# Altium PCB pogo_socket_2port.PcbDoc
Units mil, origin at the board's own origin, x right, y up, seen from the top; angles counter-clockwise.
Board outline 1442 x 625 mil, 4 copper layers (Top Layer, Mid-Layer 1, Mid-Layer 2, Bottom Layer), stack 43.512 mil thick; 2 components, 3 nets, 25 pads, 234 vias.
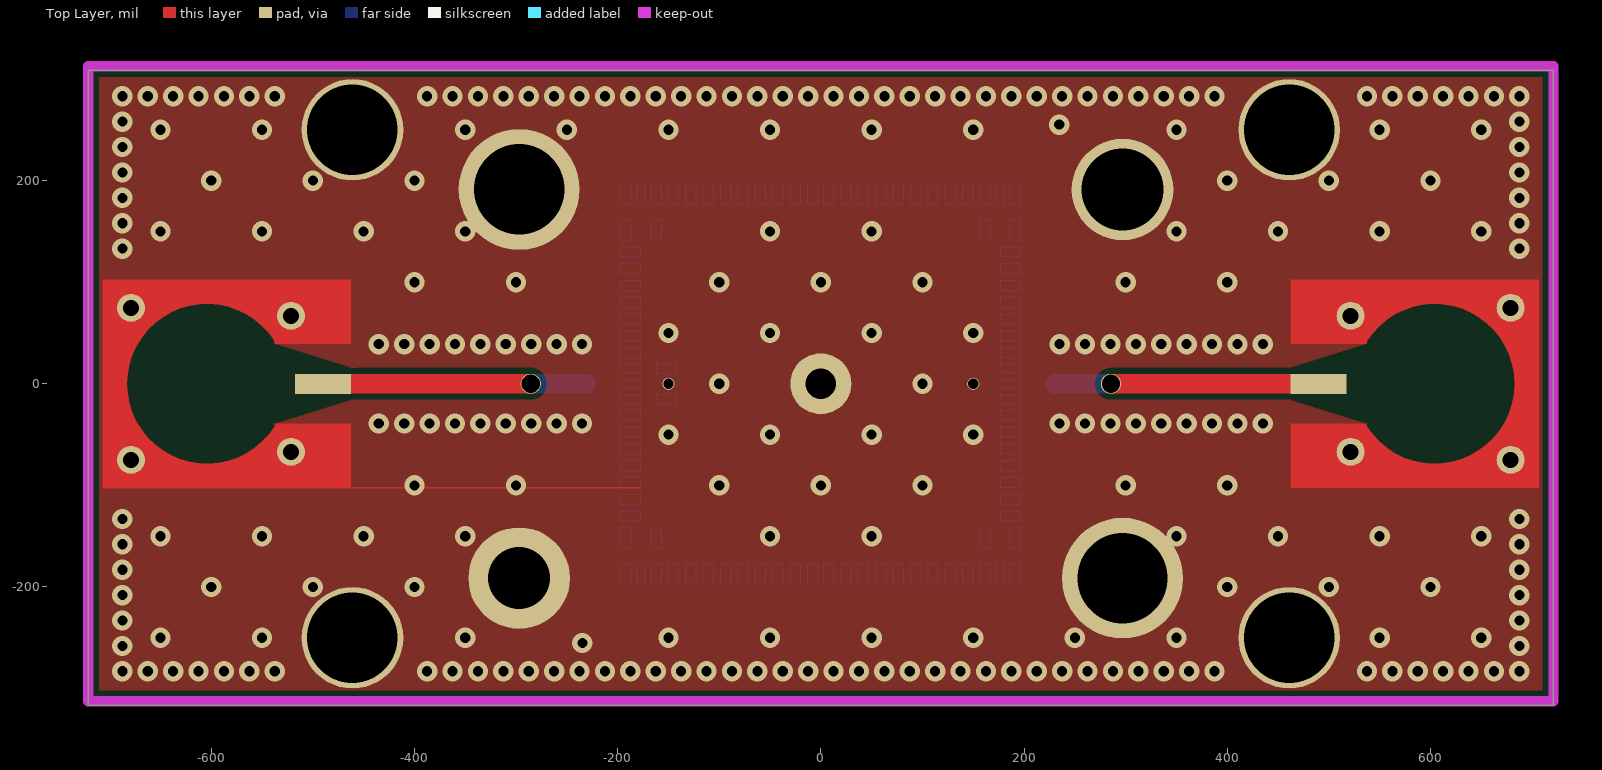
[diagram p0: Top Layer view]
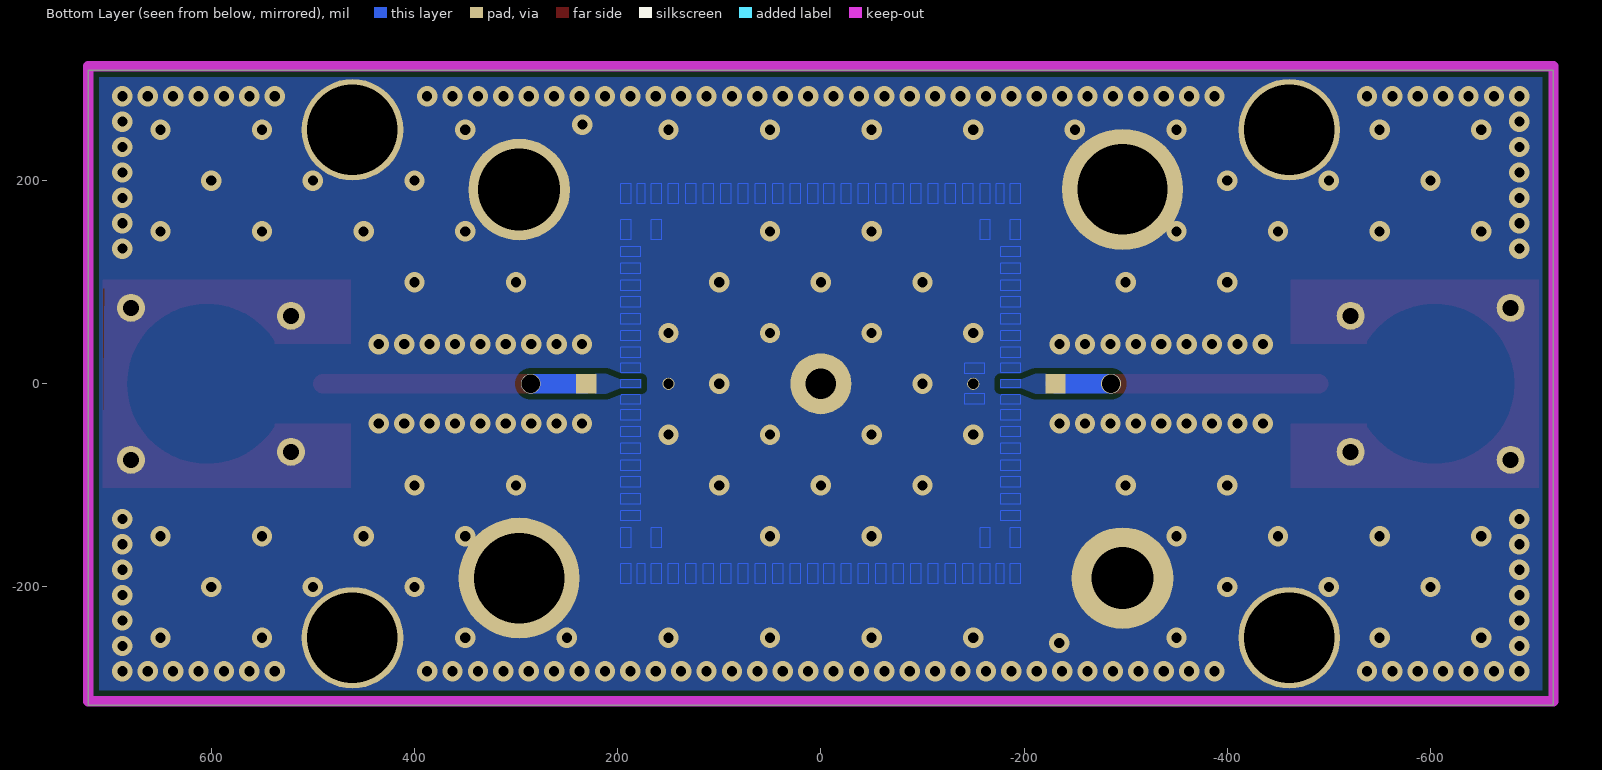
[diagram p1: Bottom Layer view, seen from below]
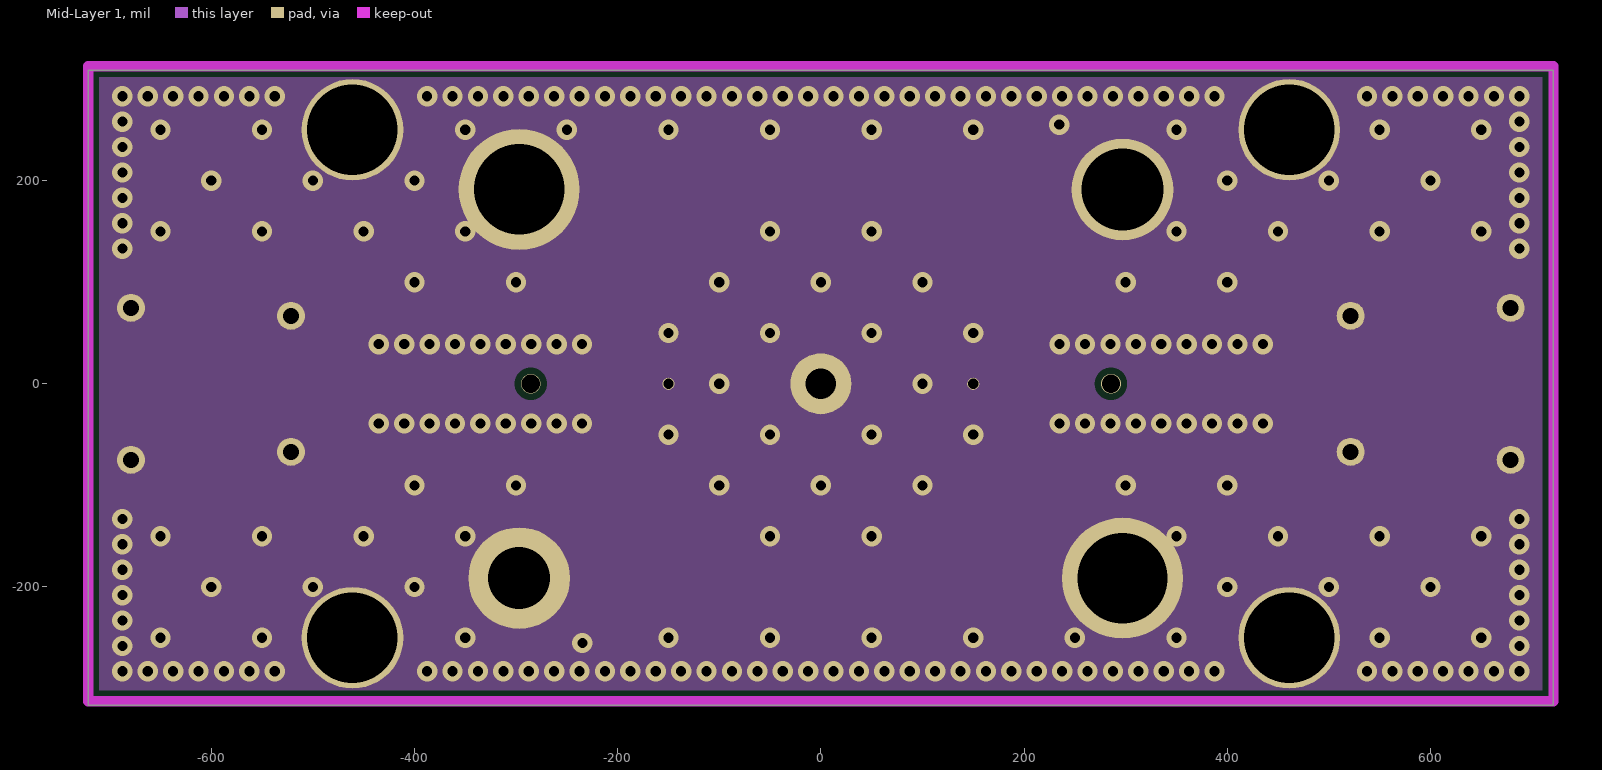
[diagram p2: Mid-Layer 1]
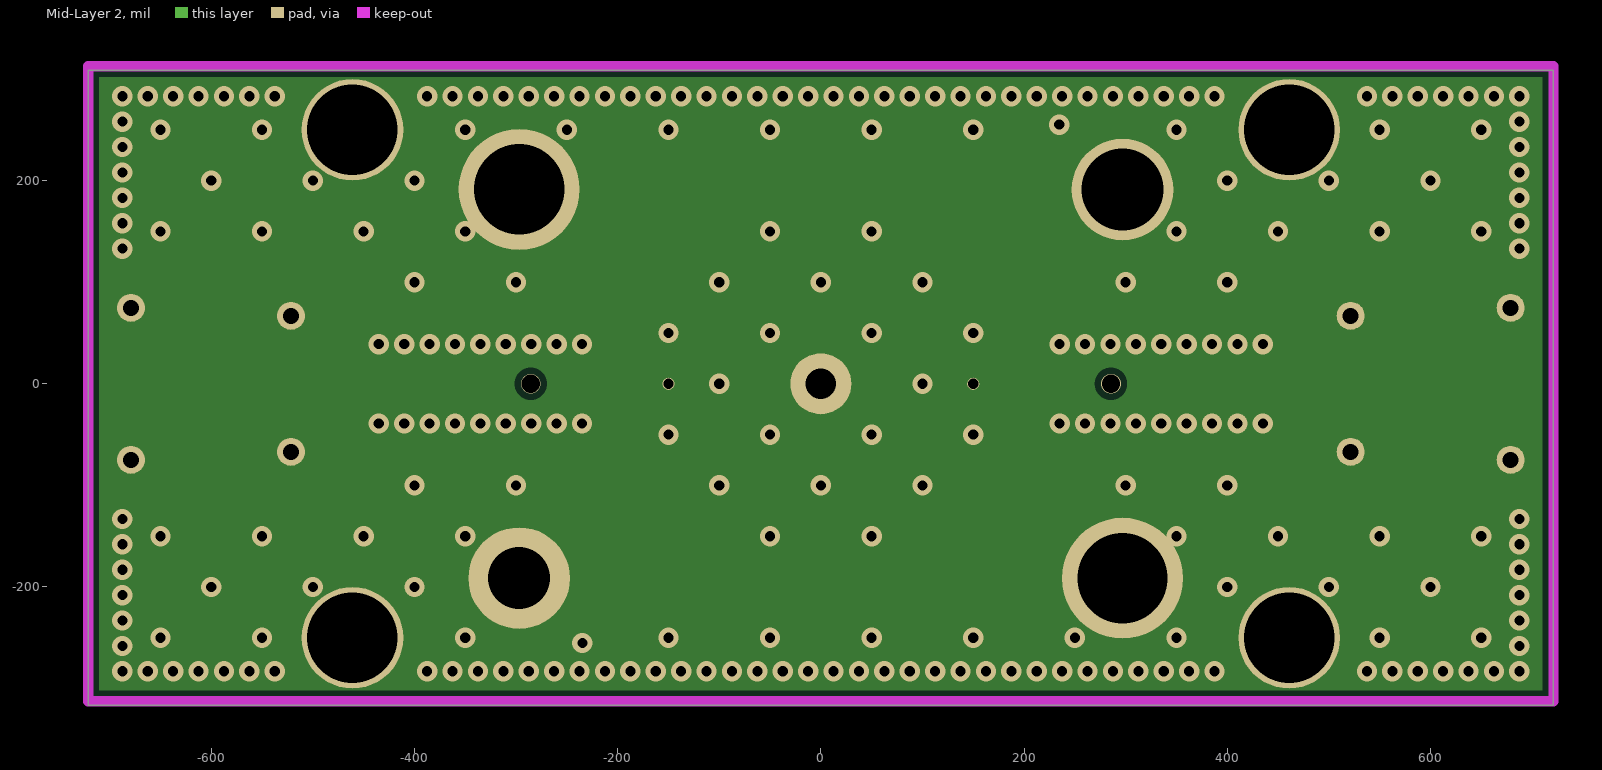
[diagram p3: Mid-Layer 2]

## Layer stack, top to bottom
Top Solder: solder mask 1, SM-001, Dk 4
Top Layer: signal copper 1.378
Core1: dielectric 10, RO4350B, Dk 3.48
Mid-Layer 1: signal copper 1.378
Dielectric 1: prepreg 7, Composite dielectric, Dk 4.24
Dielectric 2: prepreg 4, Composite dielectric, Dk 4.24
Dielectric 3: prepreg 7, Composite dielectric, Dk 4.24
Mid-Layer 2: signal copper 1.378
Core2: dielectric 10, RO-4350B, Dk 3.48
Bottom Layer: signal copper 1.378
Bottom Solder: solder mask 1, SM-001, Dk 4

## Board outline
-721,-316.4 -721,308.6 721,308.6 721,-316.4

## Design rules (kind name [scope] priority, off if disabled: settings)
Clearance "Stitching GND" [IsStitchingVia and InNet('GND') vs (IsVia and (Not IsStitchingVia)) Or IsPad] p1: gap=5 ignorepadtopadclearanceinfootprint=FALSE
Clearance Clearance_1 [All] p2: gap=10 ignorepadtopadclearanceinfootprint=FALSE except(0: Poly-Region; 3.74: Track-Region SMDPad-Region Region-Region; 3.94: Track-Track Track-SMDPad; 4: Track-Fill; 5: Track-THPad; 6: Arc-Poly Track-Poly SMDPad-Poly THPad-Poly Via-Poly Fill-Poly Poly-Poly Poly-Text Poly-Hole; 8: Arc-SMDPad; 9: SMDPad-SMDPad)
PolygonConnect [All] p1: connectstyle=Direct reliefconductorwidth=10 reliefentries=4 polygonreliefangle="90 Angle" airgapwidth=10
RoutingVias [All] p1: holewidth=15 width=25 viastyle="Through Hole" minholewidth=5 minwidth=10 maxholewidth=28 maxwidth=50
SolderMaskExpansion [All] p1: expansion=4 istentingtop=FALSE
Width [All] p1 off: maxlimit=21.65 minlimit=3.94 preferedwidth=10 toplayer_prefwidth=3.94 midlayer1_minwidth=10 midlayer1_maxwidth=10 midlayer2_minwidth=10 midlayer2_maxwidth=10 bottomlayer_minwidth=10 bottomlayer_maxwidth=10 minimp=50.000000 maximp=50.000000 favimp=50.000000
Width cpw-Z-1 [All] p2 off: maxlimit=19.68 minlimit=6.87 preferedwidth=10 toplayer_minwidth=12.7 toplayer_prefwidth=15.98 impedanceprofiledriven=TRUE impedanceprofileid={FF6547F1-1ACB-4B88-A69B-03F59FE56022} impedanceprofilevalue=50.000000 minimp=50.000000 maximp=50.000000 favimp=50.000000
30 further rules are at their usual default settings.

## Components (designator, comment, footprint, x,y, rotation, side; value= is the part's Value field where it differs from the comment)
J8 "SMP-straight-19S10H-40ML5" rosenberger-19S141-40ML5 -604.2,0 r90 top
J8 "SMP-straight-19S10H-40ML5" rosenberger-19S141-40ML5 604.2,0 r270 top

## Footprints (in the part's own frame and the unit in brackets; to place one, negate y for a bottom-side part, rotate by r counter-clockwise, add the part's x,y. Pads: shape width x height; smd on the part's side, far side on the other; paste and mask are expansions set on the pad)
rosenberger-19S141-40ML5 [mm]
  rect 0.5x1.4 smd: 1(0,-2.9)
  round 0.7 hole 0.4 mask+0: gnd(-1.9,1.9) gnd(-1.7,-2.1) gnd(1.7,-2.1) gnd(1.9,1.9)
  Top Layer region: -2.6,-3.6 -2.6,2.6 2.6,2.6 2.6,-3.6 1,-3.6 1,-1.696 1.06,-1.696 1.759,-0.951 2,0.042 1.718,1.024 0.988,1.739 0,2 -0.988,1.739 -1.718,1.024 -2,0.042 -1.759,-0.951 -1.06,-1.696 -1.06,-1.696 -1,-1.696 -1,-3.6
  body extent -2.5,-3.6 2.5,2.4, height 4.1

## Part data
J8 J8: "LIMITED DETENT SMP Connector Plug, Male Pin 50Ohm Surface Mount Solder", Package=None, Supplier Part Number 1=1868-1125-1-ND, Availability="In Stock", Check_prices=https://www.snapeda.com/parts/853050232/Molex/view-part/?ref=eda, MF=Molex, MP=853050232, Price=None, Purchase-URL=https://pricing.snapeda.com/search/part/853050232/?ref=eda, SnapEDA_Link=https://www.snapeda.com/parts/853050232/Molex/view-part/?ref=snap, Supplier 1=Digikey

## Free pads (board coordinates)
  oval 20x19.5 smd paste-100 mask-100: 1(-285.51,0) 1(285.51,0)
  rect 20x19.5 smd far side paste-100 mask-100: 1(-231,0) 1(231,0)
  round 119 hole 89: 2(296.9,-191.3) 4(-296.9,191.3)
  round 100 hole 80.71: 3(296.9,191.13)
  round 100 hole 89: 5(-461,-250) 5(-461,250) 5(461,-250) 5(461,250)
  round 100 hole 61.02: 5(-296.9,-191.3)
  round 60 hole 30: 6(0,0)
  round 12 hole 10: 7(-150,0) 7(150,0)

## Via types
v1: diameter 20, hole 10, Top Layer to Bottom Layer, 232 vias
v2: diameter 19.5, hole 18, Top Layer to Bottom Layer, 2 vias

## Nets (pads, with @x,y where several pads share a name; then routed paths per layer and width w, separated by ;. In a path a pad name is that pad's centre, name@x,y a point inside that pad or via, vN(x,y) a via of type N, cw(c..) or ccw(c..) an arc to the next point about the centre after c; other vN are vias at no path point)
GND: J8.gnd pad.2 pad.3 pad.4 pad.5 pad.6 pad.7 | length 5354.9
  Bottom Layer w1: -196.85,-196.85 -186.61,-196.85 -186.61,-177.17 -196.85,-177.17 -196.85,-196.85 ; -196.85,-161.42 -186.61,-161.42 -186.61,-141.73 -196.85,-141.73 -196.85,-161.42 ; -196.85,-135.04 -196.85,-124.8 -177.17,-124.8 -177.17,-135.04 -196.85,-135.04 ; -196.85,-118.5 -196.85,-108.27 -177.17,-108.27 -177.17,-118.5 -196.85,-118.5 ; -196.85,-101.97 -196.85,-91.73 -177.17,-91.73 -177.17,-101.97 -196.85,-101.97 ; -196.85,-85.43 -196.85,-75.2 -177.17,-75.2 -177.17,-85.43 -196.85,-85.43 ; -196.85,-68.9 -196.85,-58.66 -177.17,-58.66 -177.17,-68.9 -196.85,-68.9 ; -196.85,-52.36 -196.85,-42.13 -177.17,-42.13 -177.17,-52.36 -196.85,-52.36 ; -196.85,-35.83 -196.85,-25.59 -177.17,-25.59 -177.17,-35.83 -196.85,-35.83 ; -196.85,-20.08 -196.85,-11.59 -196.26,-11 -177.75,-11 -177.17,-11.59 -177.17,-20.08 -196.85,-20.08 ; -196.85,11.59 -196.85,20.08 -177.17,20.08 -177.17,11.59 -177.75,11 -196.26,11 -196.85,11.59 ; -196.85,25.59 -196.85,35.83 -177.17,35.83 -177.17,25.59 -196.85,25.59 ; -196.85,42.13 -196.85,52.36 -177.17,52.36 -177.17,42.13 -196.85,42.13 ; -196.85,58.66 -196.85,68.9 -177.17,68.9 -177.17,58.66 -196.85,58.66 ; -196.85,75.2 -196.85,85.43 -177.17,85.43 -177.17,75.2 -196.85,75.2 ; -196.85,91.73 -196.85,101.97 -177.17,101.97 -177.17,91.73 -196.85,91.73 ; -196.85,108.27 -196.85,118.5 -177.17,118.5 -177.17,108.27 -196.85,108.27 ; -196.85,124.8 -196.85,135.04 -177.17,135.04 -177.17,124.8 -196.85,124.8 ; -196.85,141.73 -186.61,141.73 -186.61,161.42 -196.85,161.42 -196.85,141.73 ; -196.85,177.17 -186.61,177.17 -186.61,196.85 -196.85,196.85 -196.85,177.17 ; -180.71,-196.85 -172.83,-196.85 -172.83,-177.17 -180.71,-177.17 -180.71,-196.85 ; -180.71,177.17 -172.83,177.17 -172.83,196.85 -180.71,196.85 -180.71,177.17 ; -166.93,-196.85 -156.69,-196.85 -156.69,-177.17 -166.93,-177.17 -166.93,-196.85 ; -166.93,-161.42 -156.69,-161.42 -156.69,-141.73 -166.93,-141.73 -166.93,-161.42 ; -166.93,141.73 -156.69,141.73 -156.69,161.42 -166.93,161.42 -166.93,141.73 ; -166.93,177.17 -156.69,177.17 -156.69,196.85 -166.93,196.85 -166.93,177.17 ; -161.42,-20.08 -141.73,-20.08 -141.73,-9.84 -161.42,-9.84 -161.42,-20.08 ; -161.42,9.84 -141.73,9.84 -141.73,20.08 -161.42,20.08 -161.42,9.84 ; -150,-196.85 -139.76,-196.85 -139.76,-177.17 -150,-177.17 -150,-196.85 ; -150,177.17 -150,196.85 -139.76,196.85 -139.76,177.17 -150,177.17 ; -132.87,-196.85 -122.64,-196.85 -122.64,-177.17 -132.87,-177.17 -132.87,-196.85 ; -132.87,177.17 -132.87,196.85 -122.64,196.85 -122.64,177.17 -132.87,177.17 ; -115.75,-196.85 -105.51,-196.85 -105.51,-177.17 -115.75,-177.17 -115.75,-196.85 ; -115.75,177.17 -115.75,196.85 -105.51,196.85 -105.51,177.17 -115.75,177.17 ; -98.62,-196.85 -98.62,-177.17 -88.39,-177.17 -88.39,-196.85 -98.62,-196.85 ; -98.62,177.17 -98.62,196.85 -88.39,196.85 -88.39,177.17 -98.62,177.17 ; -81.5,-196.85 -81.5,-177.17 -71.26,-177.17 -71.26,-196.85 -81.5,-196.85 ; -81.5,177.17 -81.5,196.85 -71.26,196.85 -71.26,177.17 -81.5,177.17 ; -64.37,-196.85 -64.37,-177.17 -54.13,-177.17 -54.13,-196.85 -64.37,-196.85 ; -64.37,177.17 -64.37,196.85 -54.13,196.85 -54.13,177.17 -64.37,177.17 ; -47.24,-196.85 -47.24,-177.17 -37.01,-177.17 -37.01,-196.85 -47.24,-196.85 ; -47.24,177.17 -47.24,196.85 -37.01,196.85 -37.01,177.17 -47.24,177.17 ; -30.12,-196.85 -30.12,-177.17 -19.88,-177.17 -19.88,-196.85 -30.12,-196.85 ; -30.12,177.17 -19.88,177.17 -19.88,196.85 -30.12,196.85 -30.12,177.17 ; -12.99,-196.85 -12.99,-177.17 -2.76,-177.17 -2.76,-196.85 -12.99,-196.85 ; -12.99,177.17 -12.99,196.85 -2.76,196.85 -2.76,177.17 -12.99,177.17 ; 2.76,-196.85 2.76,-177.17 12.99,-177.17 12.99,-196.85 2.76,-196.85 ; 2.76,177.17 2.76,196.85 12.99,196.85 12.99,177.17 2.76,177.17 ; 19.88,-196.85 19.88,-177.17 30.12,-177.17 30.12,-196.85 19.88,-196.85 ; 19.88,177.17 19.88,196.85 30.12,196.85 30.12,177.17 19.88,177.17 ; 37.01,-196.85 37.01,-177.17 47.24,-177.17 47.24,-196.85 37.01,-196.85 ; 37.01,177.17 37.01,196.85 47.24,196.85 47.24,177.17 37.01,177.17 ; 54.13,-196.85 54.13,-177.17 64.37,-177.17 64.37,-196.85 54.13,-196.85 ; 54.13,177.17 54.13,196.85 64.37,196.85 64.37,177.17 54.13,177.17 ; 71.26,-196.85 71.26,-177.17 81.5,-177.17 81.5,-196.85 71.26,-196.85 ; 71.26,177.17 71.26,196.85 81.5,196.85 81.5,177.17 71.26,177.17 ; 88.39,-196.85 88.39,-177.17 98.62,-177.17 98.62,-196.85 88.39,-196.85 ; 88.39,177.17 88.39,196.85 98.62,196.85 98.62,177.17 88.39,177.17 ; 105.51,-196.85 105.51,-177.17 115.75,-177.17 115.75,-196.85 105.51,-196.85 ; 105.51,177.17 105.51,196.85 115.75,196.85 115.75,177.17 105.51,177.17 ; 122.64,-196.85 122.64,-177.17 132.87,-177.17 132.87,-196.85 122.64,-196.85 ; 122.64,177.17 122.64,196.85 132.87,196.85 132.87,177.17 122.64,177.17 ; 139.76,-196.85 139.76,-177.17 150,-177.17 150,-196.85 139.76,-196.85 ; 139.76,177.17 139.76,196.85 150,196.85 150,177.17 139.76,177.17 ; 156.69,-196.85 156.69,-177.17 166.93,-177.17 166.93,-196.85 156.69,-196.85 ; 156.69,-161.42 166.93,-161.42 166.93,-141.73 156.69,-141.73 156.69,-161.42 ; 156.69,141.73 156.69,161.42 166.93,161.42 166.93,141.73 156.69,141.73 ; 156.69,177.17 156.69,196.85 166.93,196.85 166.93,177.17 156.69,177.17 ; 172.83,-196.85 172.83,-177.17 180.71,-177.17 180.71,-196.85 172.83,-196.85 ; 172.83,177.17 172.83,196.85 180.71,196.85 180.71,177.17 172.83,177.17 ; 177.17,-135.04 177.17,-124.8 196.85,-124.8 196.85,-135.04 177.17,-135.04 ; 177.17,-118.5 177.17,-108.27 196.85,-108.27 196.85,-118.5 177.17,-118.5 ; 177.17,-101.97 177.17,-91.73 196.85,-91.73 196.85,-101.97 177.17,-101.97 ; 177.17,-85.43 177.17,-75.2 196.85,-75.2 196.85,-85.43 177.17,-85.43 ; 177.17,-68.9 177.17,-58.66 196.85,-58.66 196.85,-68.9 177.17,-68.9 ; 177.17,-52.36 177.17,-42.13 196.85,-42.13 196.85,-52.36 177.17,-52.36 ; 177.17,-35.83 177.17,-25.59 196.85,-25.59 196.85,-35.83 177.17,-35.83 ; 177.17,-20.08 177.17,-11.59 177.75,-11 196.26,-11 196.85,-11.59 196.85,-20.08 177.17,-20.08 ; 177.17,11.59 177.17,20.08 196.85,20.08 196.85,11.59 196.26,11 177.75,11 177.17,11.59 ; 177.17,25.59 177.17,35.83 196.85,35.83 196.85,25.59 177.17,25.59 ; 177.17,42.13 177.17,52.36 196.85,52.36 196.85,42.13 177.17,42.13 ; 177.17,58.66 177.17,68.9 196.85,68.9 196.85,58.66 177.17,58.66 ; 177.17,75.2 177.17,85.43 196.85,85.43 196.85,75.2 177.17,75.2 ; 177.17,91.73 177.17,101.97 196.85,101.97 196.85,91.73 177.17,91.73 ; 177.17,108.27 177.17,118.5 196.85,118.5 196.85,108.27 177.17,108.27 ; 177.17,124.8 177.17,135.04 196.85,135.04 196.85,124.8 177.17,124.8 ; 186.61,-196.85 186.61,-177.17 196.85,-177.17 196.85,-196.85 186.61,-196.85 ; 186.61,-161.42 186.61,-141.73 196.85,-141.73 196.85,-161.42 186.61,-161.42 ; 186.61,141.73 186.61,161.42 196.85,161.42 196.85,141.73 186.61,141.73 ; 186.61,177.17 186.61,196.85 196.85,196.85 196.85,177.17 186.61,177.17
  other v1: -687.5,-283 -662.5,-283 -637.5,-283 -612.5,-283 -587.5,-283 -562.5,-283 -537.5,-283 -387.5,-283 -362.5,-283 -337.5,-283 -312.5,-283 -287.5,-283 -262.5,-283 -237.5,-283 -212.5,-283 -187.5,-283 -162.5,-283 -137.5,-283 -112.5,-283 -87.5,-283 -62.5,-283 -37.5,-283 -12.5,-283 12.5,-283 37.5,-283 62.5,-283 87.5,-283 112.5,-283 137.5,-283 162.5,-283 187.5,-283 212.5,-283 237.5,-283 262.5,-283 287.5,-283 312.5,-283 337.5,-283 362.5,-283 387.5,-283 537.5,-283 562.5,-283 587.5,-283 612.5,-283 637.5,-283 662.5,-283 687.5,-283 -687.5,-258 687.5,-258 -234.71,-255.09 -650,-250 -550,-250 -350,-250 -150,-250 -50,-250 50,-250 150,-250 250,-250 350,-250 550,-250 650,-250 -687.5,-233 687.5,-233 -687.5,-208 687.5,-208 -600,-200 -500,-200 -400,-200 400,-200 500,-200 600,-200 -687.5,-183 687.5,-183 -687.5,-158 687.5,-158 -650,-150 -550,-150 -450,-150 -350,-150 -50,-150 50,-150 350,-150 450,-150 550,-150 650,-150 -687.5,-133 687.5,-133 -400,-100 -300,-100 -100,-100 0,-100 100,-100 300,-100 400,-100 -150,-50 -50,-50 50,-50 150,-50 -435.06,-39.05 -410.06,-39.05 -385.06,-39.05 -360.06,-39.05 -335.06,-39.05 -310.06,-39.05 -285.06,-39.05 -260.06,-39.05 -235.06,-39.05 235.06,-39.06 260.06,-39.06 285.06,-39.06 310.06,-39.06 335.06,-39.06 360.06,-39.06 385.06,-39.06 410.06,-39.06 435.06,-39.06 -100,0 100,0 -435.06,39.06 -410.06,39.06 -385.06,39.06 -360.06,39.06 -335.06,39.06 -310.06,39.06 -285.06,39.06 -260.06,39.06 -235.06,39.06 235.06,39.05 260.06,39.05 285.06,39.05 310.06,39.05 335.06,39.05 360.06,39.05 385.06,39.05 410.06,39.05 435.06,39.05 -150,50 -50,50 50,50 150,50 -400,100 -300,100 -100,100 0,100 100,100 300,100 400,100 -687.5,133 687.5,133 -650,150 -550,150 -450,150 -350,150 -50,150 50,150 350,150 450,150 550,150 650,150 -687.5,158 687.5,158 -687.5,183 687.5,183 -600,200 -500,200 -400,200 400,200 500,200 600,200 -687.5,208 687.5,208 -687.5,233 687.5,233 -650,250 -550,250 -350,250 -250,250 -150,250 -50,250 50,250 150,250 350,250 550,250 650,250 234.71,255.09 -687.5,258 687.5,258 -687.5,283 -662.5,283 -637.5,283 -612.5,283 -587.5,283 -562.5,283 -537.5,283 -387.5,283 -362.5,283 -337.5,283 -312.5,283 -287.5,283 -262.5,283 -237.5,283 -212.5,283 -187.5,283 -162.5,283 -137.5,283 -112.5,283 -87.5,283 -62.5,283 -37.5,283 -12.5,283 12.5,283 37.5,283 62.5,283 87.5,283 112.5,283 137.5,283 162.5,283 187.5,283 212.5,283 237.5,283 262.5,283 287.5,283 312.5,283 337.5,283 362.5,283 387.5,283 537.5,283 562.5,283 587.5,283 612.5,283 637.5,283 662.5,283 687.5,283
sig_1: J8.1@-490.02,0 pad.1@-231,0 pad.1@-285.51,0 | length 314.1
  Top Layer w19.5: J8.1@-490.02,0 v2(-285.51,0)
  Bottom Layer w1: -196.85,-3.94 -196.85,3.94 -177.17,3.94 -177.17,-3.94 -196.85,-3.94
  Bottom Layer w19.5: v2(-285.51,0) pad.1@-231,0
sig_2: J8.1@490.02,0 pad.1@231,0 pad.1@285.51,0 | length 314.1
  Top Layer w19.5: v2(285.51,0) J8.1@490.02,0
  Bottom Layer w1: 177.17,-3.94 196.85,-3.94 196.85,3.94 177.17,3.94 177.17,-3.94
  Bottom Layer w19.5: pad.1@231,0 v2(285.51,0)

## Polygon pours and split planes (outlines as drawn)
GND on Top Layer "NONET_L01_P-001" (solid, pour order 52): 722.9,-92.47 722.9,102.45 706.56,102.45 706.56,-102.27 722.9,-102.27
GND on Top Layer "NONET_L01_P-001" (solid, pour order 51): -722.9,92.47 -722.9,-102.45 -706.56,-102.45 -706.56,102.27 -722.9,102.27
GND on Top Layer "GND_L01_P042" (solid, pour order 42): -462.46,-102.36 -462.46,102.36 -177.17,101.97 -177.17,-101.97
no net on Top Layer "NONET_L01_P035" (solid, pour order 35): -706.56,-102.36 -177.17,-102.36 -177.17,-101.97
GND on Top Layer "GND_L01_P045" (solid, pour order 45): -177.17,96.85 -177.17,-85.43 177.17,-85.43 177.17,96.85
GND on Top Layer "GND_L01_P044" (solid, pour order 44): -721,94.2 -721,312.5 721,312.5 721,94.2
GND on Top Layer "GND_L01_P043" (solid, pour order 43): -721,-312.5 -721,-82.2 721,-82.2 721,-312.5
GND on Top Layer "GND_L01_P041" (solid, pour order 41): 462.46,102.36 462.46,-102.36 177.17,-101.97 177.17,101.97
GND on Top Layer "GND_L01_P022" (solid, pour order 22): 462.46,15.84 462.46,39.37 537.43,39.37
GND on Top Layer "GND_L01_P023" (solid, pour order 23): 462.46,-15.84 462.46,-39.37 537.43,-39.37
GND on Top Layer "GND_L01_P026" (solid, pour order 26): -462.46,-15.84 -462.46,-39.37 -537.43,-39.37
GND on Top Layer "GND_L01_P027" (solid, pour order 27): -462.46,15.84 -462.46,39.37 -537.43,39.37
GND on Bottom Layer "NONET_L01_P-001" (solid, pour order 48): 722.9,-92.47 722.9,102.45 706.56,102.45 706.56,-102.27 722.9,-102.27
GND on Bottom Layer "NONET_L01_P-001" (solid, pour order 47): -722.9,92.47 -722.9,-102.45 -706.56,-102.45 -706.56,102.27 -722.9,102.27
GND on Bottom Layer "GND_L04_P031" (solid, pour order 31): -706.56,103.32 -706.56,-101.88 -177.17,-101.97 -177.17,101.97
GND on Bottom Layer "GND_L04_P038" (solid, pour order 38): -721,-312.5 -721,-82.2 721,-82.2 721,-312.5
GND on Bottom Layer "GND_L04_P037" (solid, pour order 37): -177.17,96.85 -177.17,-85.43 177.17,-85.43 177.17,96.85
GND on Bottom Layer "GND_L04_P034" (solid, pour order 34): -721,94.2 -721,312.5 721,312.5 721,94.2
GND on Bottom Layer "GND_L04_P032" (solid, pour order 32): 704.66,101.91 706.56,-102.36 177.17,-101.97 177.17,101.97
sig_1 on Bottom Layer "SIG_1_L04_P025" (solid, pour order 25): -222,-9.75 -211,-9.75 -197.5,-4.4 -176.7,-4.45 -176.7,4.4 -197.5,4.4 -211,9.75 -222,9.75
sig_2 on Bottom Layer "SIG_2_L04_P021" (solid, pour order 21): 222,9.75 211,9.75 197.5,4.4 176.7,4.45 176.7,-4.4 197.5,-4.4 211,-9.75 222,-9.75
no net on Top Solder "NONET_L01_P-001" (solid): -448.84,-149.51 -448.84,150 448.89,150 448.89,-150.39
no net on Top Solder "NONET_L01_P-001" (solid): 535.54,-39.82 458.93,-39.82 458.93,-15.79 462.89,-15.79
no net on Top Solder "NONET_L01_P-001" (solid): 535.53,38.92 458.92,38.92 458.92,14.9 462.88,14.9
no net on Top Solder "NONET_L01_P-001" (solid): 505.77,-102.69 505.77,-39.82 458.94,-39.82 458.94,-102.4 505.78,-102.4
no net on Top Solder "NONET_L01_P-001" (solid): 505.76,38.63 505.76,101.51 458.93,101.51 458.93,38.92 505.77,38.92
no net on Top Solder "NONET_L01_P-001" (solid): -535.54,39.82 -458.93,39.82 -458.93,15.79 -462.89,15.79
no net on Top Solder "NONET_L01_P-001" (solid): -535.53,-38.92 -458.92,-38.92 -458.92,-14.9 -462.88,-14.9
no net on Top Solder "NONET_L01_P-001" (solid): -505.77,102.69 -505.77,39.82 -458.94,39.82 -458.94,102.4 -505.78,102.4
no net on Top Solder "NONET_L01_P-001" (solid): -505.76,-38.63 -505.76,-101.51 -458.93,-101.51 -458.93,-38.92 -505.77,-38.92
no net on Top Solder "GND_L01_P039" (solid): -721,110.1 -721,312.5 721,312.5 721,110.1
no net on Top Solder "GND_L01_P036" (solid): -721,-312.5 -721,-110.16 721,-110.16 721,-312.5
GND on Bottom Solder "GND_L01_P036" (solid, pour order 36): -721,-312.5 -721,-82.2 721,-82.2 721,-312.5
no net on Bottom Solder "NONET_L01_P-001" (solid): 704.66,92.11 704.66,-85.09 721,-85.09 721,101.91 704.66,101.91
GND on Bottom Solder "GND_L01_P019" (solid, pour order 19): 721,102.72 721,-102.72 177.17,-101.97 177.17,101.97
GND on Bottom Solder "GND_L01_P039" (solid, pour order 39): -721,94.2 -721,312.5 721,312.5 721,94.2
no net on Bottom Solder "NONET_L01_P-001" (solid): -721,94.2 -721,-83 -704.66,-83 -704.66,104 -721,104
GND on Bottom Solder "GND_L01_P024" (solid, pour order 24): -721,-102.72 -721,102.72 -177.17,101.97 -177.17,-101.97
GND on Bottom Solder "GND_L01_P040" (solid, pour order 40): -177.17,96.85 -177.17,-85.43 177.17,-85.43 177.17,96.85
GND on Mid-Layer 2 "GND_L03_P030" (solid, pour order 30): -721,312.5 -721,-312.5 721,-312.5 721,312.5
GND on Mid-Layer 1 "GND_L02_P029" (solid, pour order 29): -721,312.5 -721,-312.5 721,-312.5 721,312.5

## Keep-outs
Keep-Out Layer:
  lines w10: -721,-312.5 -721,312.5 ; -721,-312.5 721,-312.5 ; -721,-312.5 721,-312.5 ; -721,-312.5 -721,312.5 ; -721,312.5 721,312.5 ; -721,312.5 721,312.5 ; 721,-312.5 721,312.5 ; 721,-312.5 721,312.5

## Silkscreen, mask and mechanical layers (free items; w line width, h text height)
Mechanical 1:
  drawing of 354 lines, arcs and shapes, not listed
  text "Layer" at -636,2077 h60
  text "Name" at -226.09,2077 h60
  text "Material" at 703.66,2077 h60
  text "Thickness" at 1303.51,2077 h60
  text "Constant" at 1953.34,2077 h60
  text "Board Layer Stack" at 2523.2,2077 h60
  text "Top Overlay" at -226.09,1957 h60
  text "Top Solder" at -226.09,1837 h60
  text "SM-001" at 703.66,1837 h60
  text "1.00mil" at 1303.51,1837 h60
  text "4" at 1953.34,1837 h60
  text "1" at -636,1717 h60
  text "Top Layer" at -226.09,1717 h60
  text "CF-004" at 703.66,1717 h60
  text "1.38mil" at 1303.51,1717 h60
  text "Core1" at -226.09,1597 h60
  text "RO4350B" at 703.66,1597 h60
  text "10.00mil" at 1303.51,1597 h60
  text "3.48" at 1953.34,1597 h60
  text "2" at -636,1477 h60
  text "Mid-Layer 1" at -226.09,1477 h60
  text "CF-004" at 703.66,1477 h60
  text "1.38mil" at 1303.51,1477 h60
  text "Dielectric 1" at -226.09,1357 h60
  text "PR7628" at 703.66,1357 h60
  text "7.00mil" at 1303.51,1357 h60
  text "4.24" at 1953.34,1357 h60
  text "Dielectric 2" at -226.09,1237 h60
  text "PR2116" at 703.66,1237 h60
  text "4.00mil" at 1303.51,1237 h60
  text "4.17" at 1953.34,1237 h60
  text "Dielectric 3" at -226.09,1117 h60
  text "PR7628" at 703.66,1117 h60
  text "7.00mil" at 1303.51,1117 h60
  text "4.24" at 1953.34,1117 h60
  text "3" at -636,997 h60
  text "Mid-Layer 2" at -226.09,997 h60
  text "CF-004" at 703.66,997 h60
  text "1.38mil" at 1303.51,997 h60
  text "Core2" at -226.09,877 h60
  text "RO-4350B" at 703.66,877 h60
  text "10.00mil" at 1303.51,877 h60
  text "3.48" at 1953.34,877 h60
  text "4" at -636,757 h60
  text "Bottom Layer" at -226.09,757 h60
  text "CF-004" at 703.66,757 h60
  text "1.38mil" at 1303.51,757 h60
  text "Bottom Solder" at -226.09,637 h60
  text "SM-001" at 703.66,637 h60
  text "1.00mil" at 1303.51,637 h60
  text "4" at 1953.34,637 h60
  text "Bottom Overlay" at -226.09,517 h60

## Dimensions
-721,312.5 to 721,312.5 on Mechanical 1
721,312.5 to 721,-312.5 on Mechanical 1